# Altium PCB 7 segment 2 layer.PcbDoc
Units mil, origin at the board's own origin, x right, y up, seen from the top; angles counter-clockwise.
Board outline 5118.11 x 3543.31 mil, 2 copper layers (Top Layer, Bottom Layer); 50 components, 86 nets, 283 pads, 9 vias.
Unrouted connection lines stored in the file: 1.
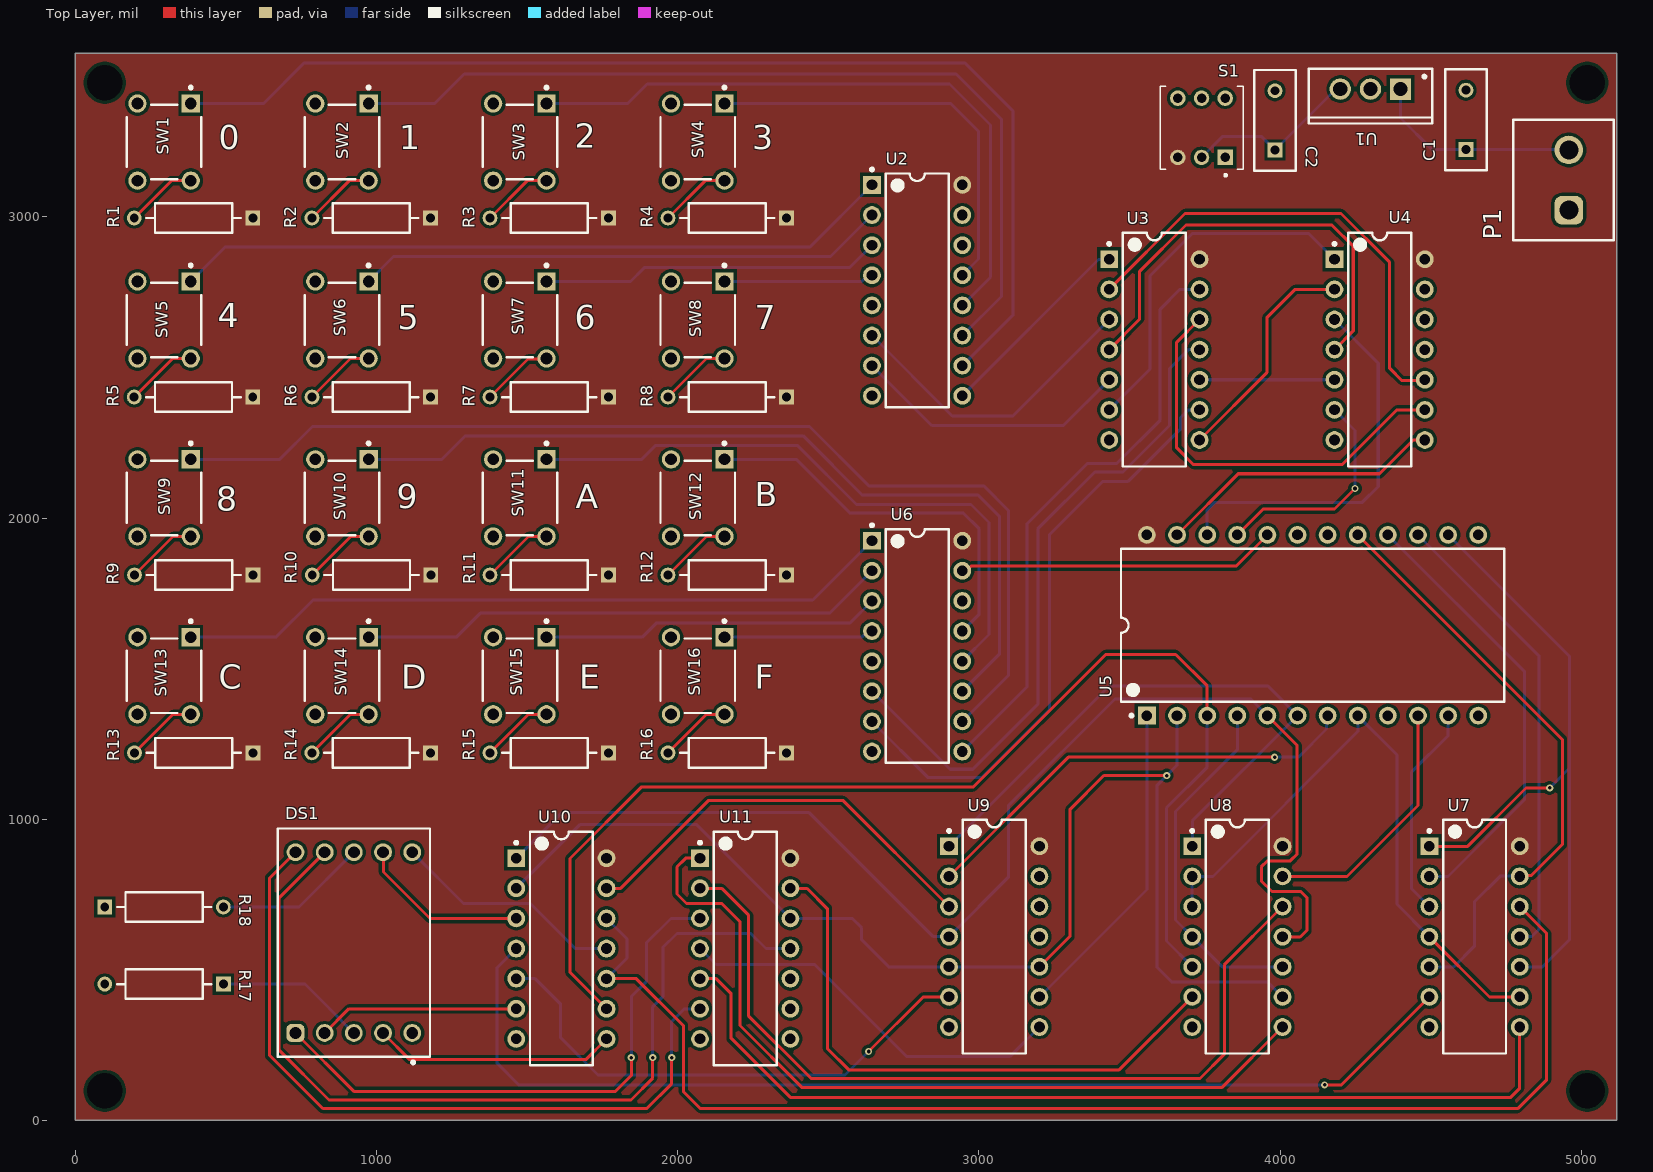
[diagram p0: Top Layer view]
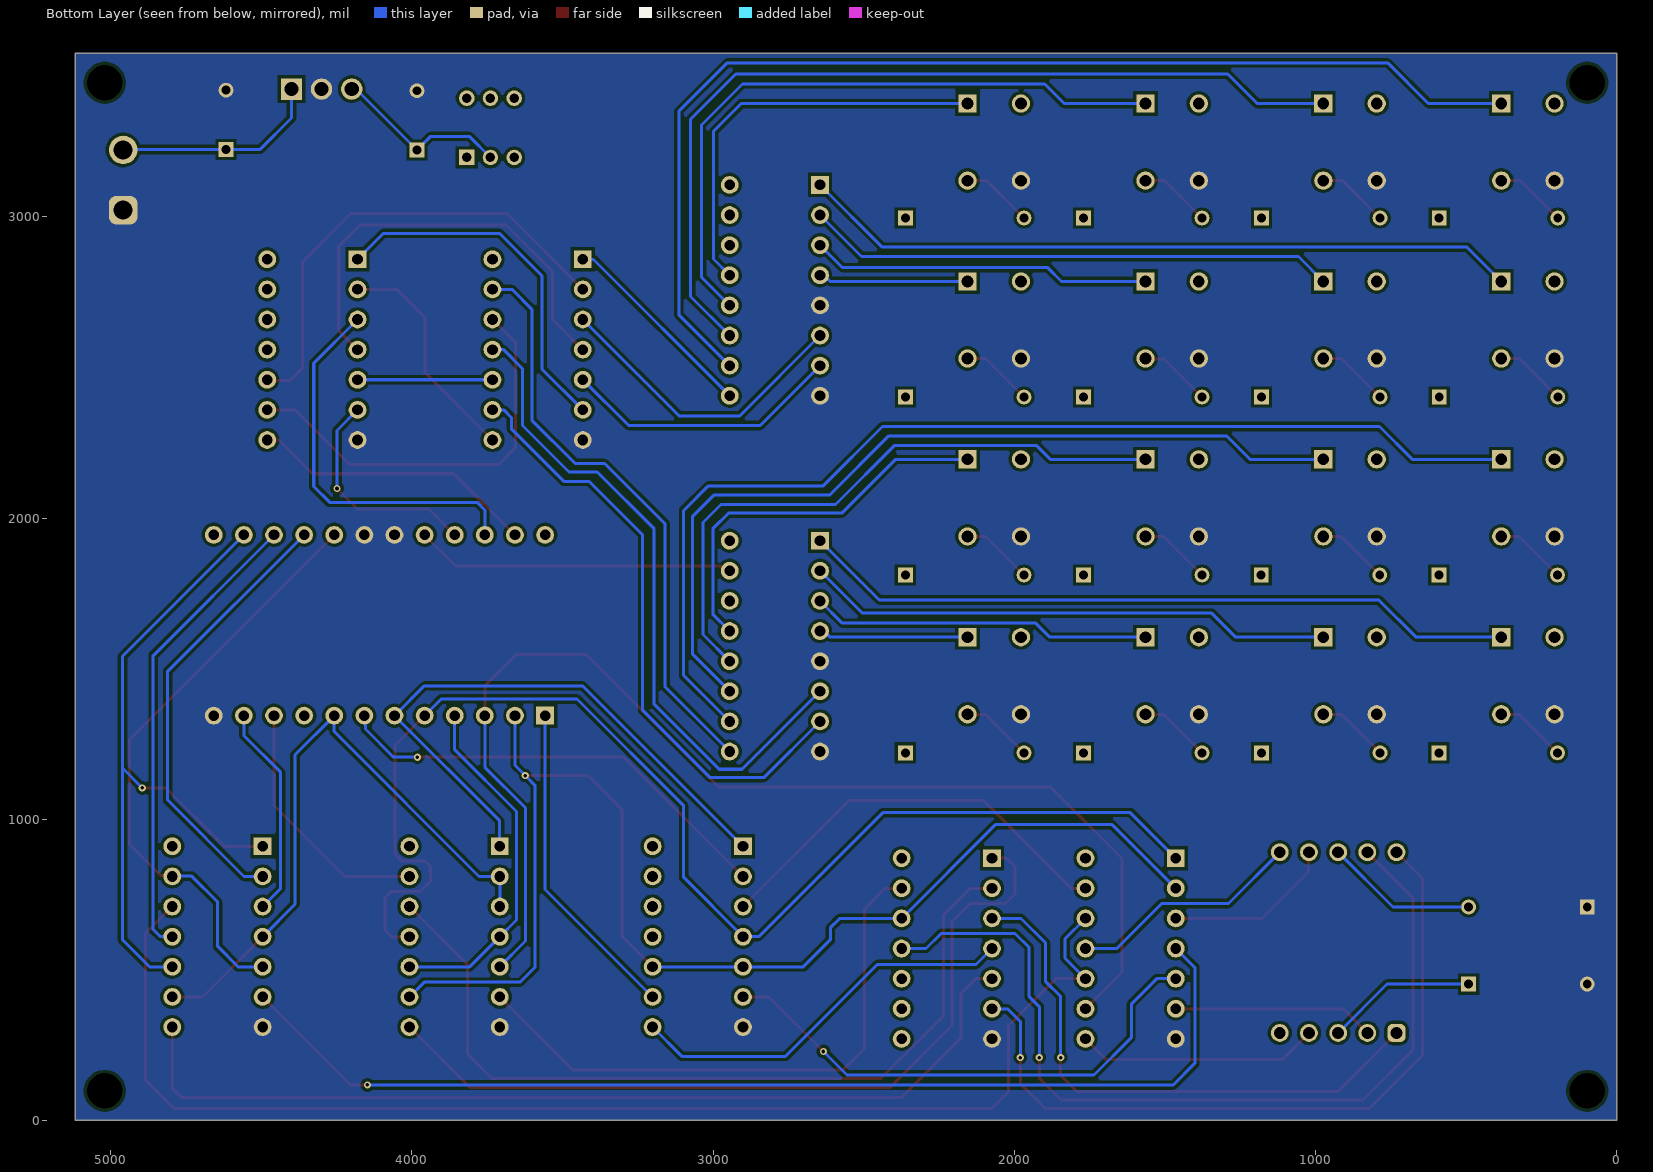
[diagram p1: Bottom Layer view, seen from below]
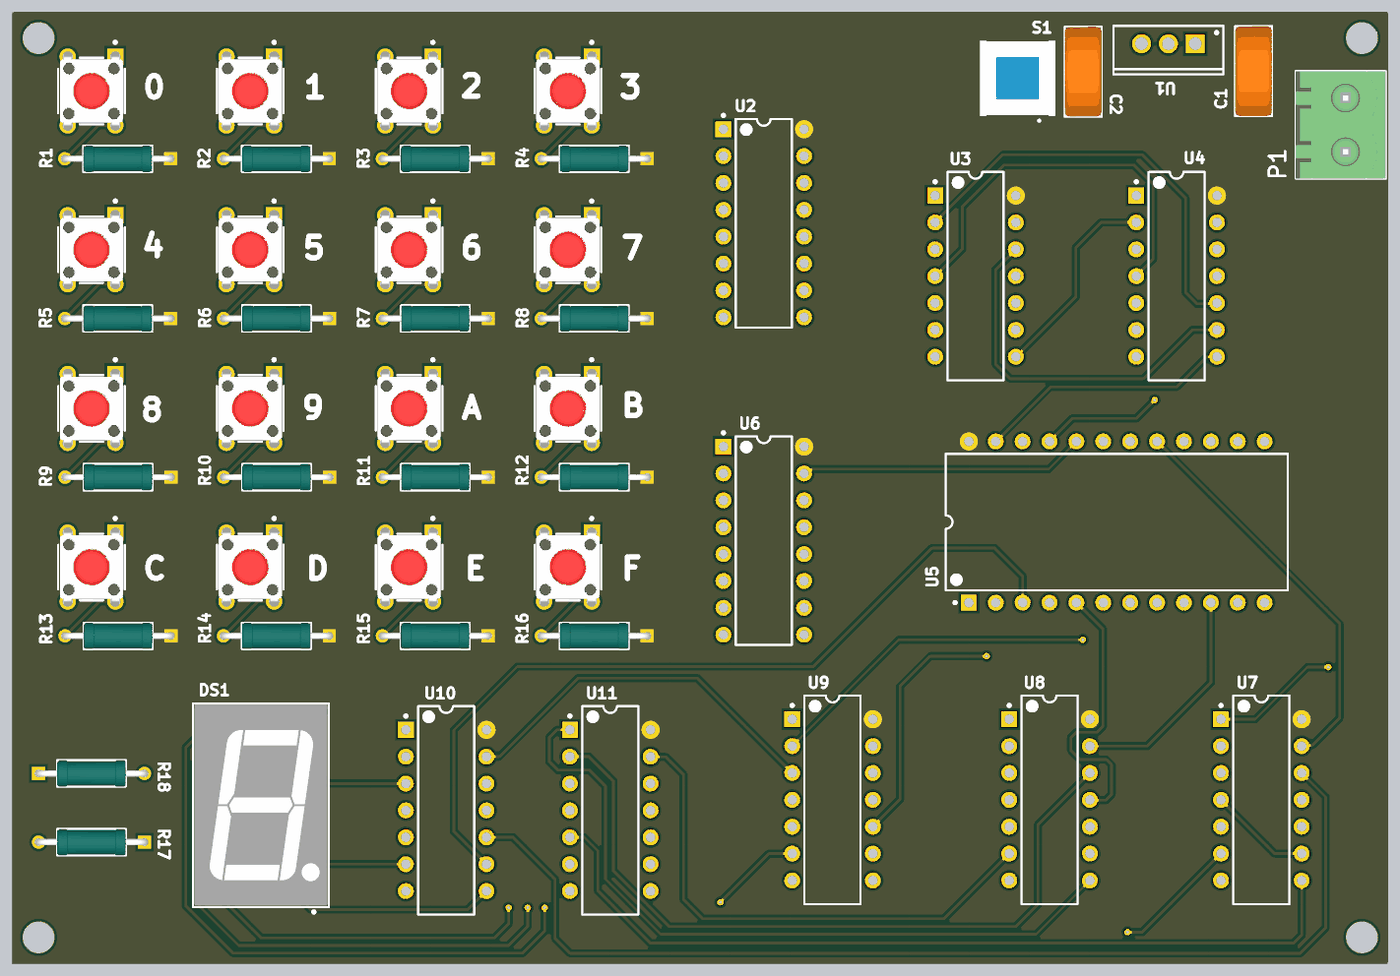
[diagram p2: 3D render of the assembled board from above, using the file's embedded part models]

## Layer stack, top to bottom
Top Solder: solder mask 0.4, Solder Resist, Dk 3.5
Top Layer: signal copper 1.4
Dielectric 1: dielectric 12.6, FR-4, Dk 4.8
Bottom Layer: signal copper 1.4
Bottom Solder: solder mask 0.4, Solder Resist, Dk 3.5

## Board outline
0,0 5118.11,0 5118.11,3543.31 0,3543.31

## Design rules (kind name [scope] priority, off if disabled: settings)
BoardOutlineClearance [All] p1 off: gap=10 ignorepadtopadclearanceinfootprint=FALSE except(0: Arc-SplitContinuation Track-SplitContinuation SMDPad-SplitContinuation THPad-SplitContinuation Via-SplitContinuation Fill-SplitContinuation Poly-SplitContinuation Region-SplitContinuation Text-SplitContinuation)
Clearance [All] p1: gap=10 ignorepadtopadclearanceinfootprint=FALSE
HoleSize [All] p1: absolutevalues=TRUE maxlimit=200 minlimit=1 maxpercent=80.000 minpercent=20.000
PlaneConnect [All] p1: planeconnectstyle=Direct reliefexpansion=20 reliefentries=4 reliefconductorwidth=10 reliefairgap=10
PolygonConnect [All] p1: connectstyle=Direct reliefconductorwidth=10 reliefentries=4 polygonreliefangle="90 Angle" airgapwidth=10
RoutingVias [All] p1: holewidth=28 width=50 viastyle="Through Hole" minholewidth=23.62 minwidth=39.37 maxholewidth=28 maxwidth=50
SolderMaskExpansion [All] p1: expansion=4 istentingtop=FALSE
SupplyNets "Schematic Supply Nets_1" [InNet('+5')] p1: voltage=0.000
SupplyNets "Schematic Supply Nets" [InNet('GND')] p2: voltage=0.000
Width [All] p1: maxlimit=10 minlimit=10 preferedwidth=10
28 further rules are at their usual default settings.

## Classes and differential pairs
component class "switch 2": R1 R2 R3 R4 R5 R6 R7 R8 R9 R10 R11 R12 R13 R14 R15 R16 SW1 SW2 SW3 SW4 SW5 SW6 SW7 SW8 SW9 SW10 SW11 SW12 SW13 SW14 SW15 SW16
component class "Input power": C1 C2 P1 S1 U1
component class "Final out 2": DS1 R17 R18 U10 U11
component class "encode and decode 2": U2 U3 U4 U5 U6
component class "AND operations 2": U7 U8 U9

## Components (designator, comment, footprint, x,y, rotation, side; value= is the part's Value field where it differs from the comment)
C1 "D222K33Y5PL6UJ5R" FP-D222K33Y5PL6UJ5R-MFG 4617.07,3322 r90 top
C2 "D222K33Y5PL6UJ5R" FP-D222K33Y5PL6UJ5R-MFG 3983.07,3320 r90 top
DS1 "157142V12703" WL-T7DS_L19W12.6H7.9 925.2,590.55 r0 top
P1 "691311500002" 691311500002 4940.94,3122.05 r90 top
R1 "MRS25000C1001FCT00" FP-MRS25-MFG 393,2996.06 r180 top
R2 "MRS25000C1001FCT00" FP-MRS25-MFG 982.85,2996.06 r180 top
R3 "MRS25000C1001FCT00" FP-MRS25-MFG 1573.85,2996.06 r180 top
R4 "MRS25000C1001FCT00" FP-MRS25-MFG 2165,2996.06 r180 top
R5 "MRS25000C1001FCT00" FP-MRS25-MFG 392.85,2401.57 r180 top
R6 "MRS25000C1001FCT00" FP-MRS25-MFG 983,2401.57 r180 top
R7 "MRS25000C1001FCT00" FP-MRS25-MFG 1574,2401.57 r180 top
R8 "MRS25000C1001FCT00" FP-MRS25-MFG 2164.85,2401.57 r180 top
R9 "MRS25000C1001FCT00" FP-MRS25-MFG 393.85,1811.02 r180 top
R10 "MRS25000C1001FCT00" FP-MRS25-MFG 983.85,1811.02 r180 top
R11 "MRS25000C1001FCT00" FP-MRS25-MFG 1574,1811.02 r180 top
R12 "MRS25000C1001FCT00" FP-MRS25-MFG 2165,1811.02 r180 top
R13 "MRS25000C1001FCT00" FP-MRS25-MFG 393.85,1220.47 r180 top
R14 "MRS25000C1001FCT00" FP-MRS25-MFG 982.85,1220.47 r180 top
R15 "MRS25000C1001FCT00" FP-MRS25-MFG 1573.85,1220.47 r180 top
R16 "MRS25000C1001FCT00" FP-MRS25-MFG 2165,1220.47 r180 top
R17 "MRS25000C1001FCT00" FP-MRS25-MFG 295.28,452.76 r180 top
R18 "MRS25000C1001FCT00" FP-MRS25-MFG 295.28,708.66 r0 top
S1 "TL2230OAF140" SW_TL2230OAF140 3739.33,3295.43 r180 top
SW1 "1-1825910-5" FP-1-1825910-5-MFG 295.28,3248.03 r0 top
SW2 "1-1825910-5" FP-1-1825910-5-MFG 885.83,3248.03 r0 top
SW3 "1-1825910-5" FP-1-1825910-5-MFG 1476.38,3248.03 r0 top
SW4 "1-1825910-5" FP-1-1825910-5-MFG 2066.93,3248.03 r0 top
SW5 "1-1825910-5" FP-1-1825910-5-MFG 295.28,2657.48 r0 top
SW6 "1-1825910-5" FP-1-1825910-5-MFG 885.83,2657.48 r0 top
SW7 "1-1825910-5" FP-1-1825910-5-MFG 1476.38,2657.48 r0 top
SW8 "1-1825910-5" FP-1-1825910-5-MFG 2066.93,2657.48 r0 top
SW9 "1-1825910-5" FP-1-1825910-5-MFG 295.28,2066.93 r0 top
SW10 "1-1825910-5" FP-1-1825910-5-MFG 885.83,2066.93 r0 top
SW11 "1-1825910-5" FP-1-1825910-5-MFG 1476.38,2066.93 r0 top
SW12 "1-1825910-5" FP-1-1825910-5-MFG 2066.93,2066.93 r0 top
SW13 "1-1825910-5" FP-1-1825910-5-MFG 295.28,1476.38 r0 top
SW14 "1-1825910-5" FP-1-1825910-5-MFG 885.83,1476.38 r0 top
SW15 "1-1825910-5" FP-1-1825910-5-MFG 1476.38,1476.38 r0 top
SW16 "1-1825910-5" FP-1-1825910-5-MFG 2066.93,1476.38 r0 top
U1 "L7805CP" TO220FP 4300.07,3424 r180 top
U2 "SN74LS148N" N0016A 2795.28,2755.91 r0 top
U3 "SN74HCU04N" N0014A 3582.68,2559.06 r0 top
U4 "SN7432N" N0014A 4330.71,2559.06 r0 top
U5 "SN74154N" N0024A 4108,1644 r90 top
U6 "SN74LS148N" N0016A 2795.28,1574.8 r0 top
U7 "SN74LS11N" N0014A 4645.67,610.24 r0 top
U8 "SN74LS11N" N0014A 3858.27,610.24 r0 top
U9 "SN74S08N" N0014A 3051.18,610.24 r0 top
U10 "SN74S08N" N0014A 1614.17,570.87 r0 top
U11 "SN74S08N" N0014A 2224.41,570.87 r0 top

## Footprints (in the part's own frame and the unit in brackets; to place one, negate y for a bottom-side part, rotate by r counter-clockwise, add the part's x,y. Pads: shape width x height; smd on the part's side, far side on the other; paste and mask are expansions set on the pad)
691311500002 [mm] "5,08mm - PCB Headers - Vertical - Opened ends -02p"
  rrect50% 2.4x2.4 hole 1.6: 1(-2.54,-0.45)
  round 2.4 hole 1.6: 2(2.54,-0.45)
  silkscreen extent -5.08,-4.25 5.08,4.25, body extent -5.08,-4.25 5.08,4.25, height 12.05
FP-1-1825910-5-MFG [mm]
  rect 1.54x1.54 hole 0.99 paste-2539.97 mask+0: 1(2.25,3.25)
  round 1.54 hole 0.99 paste-2539.97 mask+0: 2(2.25,-3.25) 3(-2.25,3.25) 4(-2.25,-3.25)
  silkscreen extent -3.15,-3.15 3.15,4.72, body extent -3.24,-4.12 3.24,4.12, height 0.25
FP-D222K33Y5PL6UJ5R-MFG [mm]
  rect 1.25x1.25 hole 0.75 paste-2539.97 mask+0: 1(-2.5,0)
  round 1.25 hole 0.75 paste-2539.97 mask+0: 2(2.5,0)
  silkscreen extent -4.25,-1.75 4.25,1.75, body extent -4.35,-1.85 4.35,1.85, height 0.25
FP-MRS25-MFG [mm]
  rect 1.25x1.25 hole 0.75 paste-2539.97 mask+0: 1(-5,0)
  round 1.25 hole 0.75 paste-2539.97 mask+0: 2(5,0)
  silkscreen extent -3.98,-1.25 3.98,1.25, body extent -5.73,-1.35 5.73,1.35, height 0.25
N0014A [mm] "DIP, 14-Leads, Body 19.7x6.6mm, Pitch 2.54mm"
  rect 1.5x1.5 hole 0.9: 1(-3.81,7.62)
  round 1.5 hole 0.9: 2(-3.81,5.08) 3(-3.81,2.54) 4(-3.81,0) 5(-3.81,-2.54) 6(-3.81,-5.08) 7(-3.81,-7.62) 8(3.81,-7.62) 9(3.81,-5.08) 10(3.81,-2.54) 11(3.81,0) 12(3.81,2.54) 13(3.81,5.08) 14(3.81,7.62)
  silkscreen extent -3.93,-9.85 2.65,9.85, body extent -3.95,-9.85 3.95,9.85, height 5.08
N0016A [mm] "DIP, 16-Leads, Body 19.7x6.6mm, Pitch 2.54mm"
  rect 1.5x1.5 hole 0.9: 1(-3.81,8.89)
  round 1.5 hole 0.9: 2(-3.81,6.35) 3(-3.81,3.81) 4(-3.81,1.27) 5(-3.81,-1.27) 6(-3.81,-3.81) 7(-3.81,-6.35) 8(-3.81,-8.89) 9(3.81,-8.89) 10(3.81,-6.35) 11(3.81,-3.81) 12(3.81,-1.27) 13(3.81,1.27) 14(3.81,3.81) 15(3.81,6.35) 16(3.81,8.89)
  silkscreen extent -3.93,-9.85 2.65,10.31, body extent -3.95,-9.85 3.95,9.85, height 5.08
N0024A [mm] "DIP, 24-Leads, Body 32.25x14.2mm, Pitch 2.54mm"
  rect 1.5x1.5 hole 0.9: 1(-7.62,13.97)
  round 1.5 hole 0.9: 2(-7.62,11.43) 3(-7.62,8.89) 4(-7.62,6.35) 5(-7.62,3.81) 6(-7.62,1.27) 7(-7.62,-1.27) 8(-7.62,-3.81) 9(-7.62,-6.35) 10(-7.62,-8.89) 11(-7.62,-11.43) 12(-7.62,-13.97) 13(7.62,-13.97) 14(7.62,-11.43) 15(7.62,-8.89) 16(7.62,-6.35) 17(7.62,-3.81) 18(7.62,-1.27) 19(7.62,1.27) 20(7.62,3.81) 21(7.62,6.35) 22(7.62,8.89) 23(7.62,11.43) 24(7.62,13.97)
  silkscreen extent -7.74,-16.15 6.45,16.15, body extent -7.76,-16.12 7.76,16.12, height 5.08
SW_TL2230OAF140 [mm]
  rect 1.308x1.308 / inner round 1.308 / far side rect 1.308x1.308 hole 0.8: 1(-2,2.5)
  round 1.308 hole 0.8: 2(0,2.5) 3(2,2.5) 4(-2,-2.5) 5(0,-2.5) 6(2,-2.5)
  silkscreen extent -3.5,-3.5 3.5,4.1, body extent -3.5,-3.5 3.5,3.5, height 12.5
TO220FP [mm] "TO, Thru-Hole, Vertical, Heatsink Mounted; 3 In-Line Leads; Pitch 2.54 mm"
  rect 1.8x1.8 hole 1.2: 1(-2.54,0)
  round 1.8 hole 1.2: 2(0,0) 3(2.54,0)
  silkscreen extent -5.2,-1.7 5.2,2.9, body extent -5.25,-1.75 5.25,2.95, height 20
WL-T7DS_L19W12.6H7.9 [mm] "7 Segments Display THT Single Digit , body 12.6x19mm"
  rrect50% 1.5x1.5 hole 1: 1(-4.92,-7.62)
  round 1.5 hole 1: 2(-2.46,-7.62) 3(0,-7.62) 4(2.46,-7.62) 5(4.92,-7.62) 6(4.92,7.62) 7(2.46,7.62) 8(0,7.62) 9(-2.46,7.62) 10(-4.92,7.62)
  silkscreen extent -6.43,-10.22 6.43,9.62, body extent -6.3,-9.5 6.3,9.5, height 8.1

## Part data
C1 C2: library part CMP-02417-000074-1, "CAP CER 2200PF 500V Y5P RADIAL", Capacitance=2.2nF, Case/Package=Radial, Dielectric=Y5P, Max Operating Temperature=85°C, Min Operating Temperature=-30°C, Package Quantity=2000, Resistor Type=Ceramic, Tolerance=10%, Voltage Rating=500V, Construction=RADIAL, Contact Plating=Tin, Depth=4mm, Lead Diameter=0.6mm, Lead Pitch=5mm, Lead/Base Style=Kinked, Mount="Through Hole", Packaging="Tape and Reel", Radiation Hardening=No, RoHS Compliant=Yes, Series=D, Termination=Radial
DS1: library part CMP-03913-119894004-1, "157142V12703 7-Seg Display, Comm Cathode, Grn, 46Mcd Rohs Compliant: Yes", Forward Current=100mA, Forward Voltage=2.2V, Max Operating Temperature=85°C, Max Reverse Voltage (DC)=5V, Min Operating Temperature=-40°C, Dominant Wavelength=572nm, Height=8mm, Length=19mm, Luminous Intensity=25mcd, NexarPartId=119894004, RoHS=Compliant, Width=12.6mm
P1: library part CMP-1502-02123-2, Color=Green, Current=20A, Voltage=300V, Contact Material=Brass, Contact Plating=Tin, Gender=Male, Height=12mm, Lead Pitch=5.08mm, Length=8.5mm, Mount="Through Hole", NexarPartId=8917741, Number of Contacts=2, Number of Levels=1, Number of Pins=2, Number of Positions Per Level=2, Number of Rows=1, Orientation=Vertical, Packaging=Box, Pitch=5.08mm, REACH SVHC=Unknown, RoHS=Compliant, Termination=Solder, Width=10.16mm
R1 R2 R3 R4 R5 R6 R7 R8 R9 R10 R11 R12 R13 R14 R15 R16 R17 R18: library part CMP-02408-000051-1, "RES 1K OHM 0.6W 1% AXIAL", Case/Package=Axial, Max Operating Temperature=155°C, Max Power Dissipation=600mW, Min Operating Temperature=-55°C, Package Quantity=5000, Resistance=1kR, Resistance Tolerance=1%, Resistor Type="Metal Film", Temperature Coefficient=50ppm/°C, Voltage Rating=350V, Construction=Cylindrical, Contact Plating=Tin, Diameter=2.5mm, Lead Diameter=0.6mm, Lead Free="Lead Free", Length=6.5mm, Military Standard=Not, Mount="Through Hole", Number of Pins=2, Number of Terminations=2, Packaging="Tape and Reel", Power Rating=600mW, Radiation Hardening=No, RoHS Compliant=Yes, Series=MRS25, Technology="THIN FILM", Termination=Axial, Tolerance=1%, Voltage Rating (DC)=350V, Weight=0.00776oz, Width=2.5mm
S1: "Pushbutton Switch DPDT Standard Through Hole", Package=None, Check_prices=https://www.snapeda.com/parts/TL2230OAF140/E-Switch/view-part/?ref=eda, MF=E-Switch, MP=TL2230OAF140, SnapEDA_Link=https://www.snapeda.com/parts/TL2230OAF140/E-Switch/view-part/?ref=snap
SW1 SW2 SW3 SW4 SW5 SW6 SW7 SW8 SW9 SW10 SW11 SW12 SW13 SW14 SW15 SW16: library part CMP-03407-000006-1, "SWITCH TACTILE SPST-NO 0.05A 24V", Actuator Color=Red, Contact Current Rating=50mA, Contact Resistance=100mR, Max Operating Temperature=85°C, Max Voltage Rating (DC)=24V, Min Operating Temperature=-35°C, Operating Force=2.55N, Package Quantity=750, Actuator Length=5.9mm, Actuator Material=PBT, Actuator Type=Standard, Contact Material=Brass, Contact Plating=Silver, Electrical Life=100000Cycles, Illumination Type=Non-Illuminated, Length=5.99mm, Max Current Rating=50mA, Mechanical Life=100000Cycles, Mount="Through Hole", Orientation=Straight, Packaging="Loose Piece", Radiation Hardening=No, RoHS Compliant=Yes, Series="FSMJ, Alcoswitch", Switch Function=Off-Mom, Switch Travel=0.25mm, Termination="PC Pins", Throw Configuration=SPST, Type=Switch, Voltage Rating (DC)=24V
U1: library part CMP-0244-00474-1, "Positive Voltage Regulator, 5V, 3-Pin TO-220FP", ComponentLink1Description="Manufacturer URL", ComponentLink1URL=http://www.st.com, ComponentLink2Description=Datasheet, ComponentLink2URL=http://www.st.com/internet/com/TECHNICAL_RESOURCES/TECHNICAL_LITERATURE/DATASHEET/CD00000444.pdf, DatasheetVersion=16/11/2011, PackageDescription="TO, Thru-Hole, Vertical, Heatsink Mounted; 3 In-Line Leads; Pitch 2.54 mm", PackageReference=TO220FP, PackageVersion=2011
U2 U6: library part CMP-1633-00673-2, "8-line to 3-line priority encoder, N0016A, TUBE", F @ Nom Voltage(Max)(Mhz)=35, Generic Part Number=SN74LS148, ICC @ Nom Voltage(Max)(mA)=20, Manufacturer="Texas Instruments", Operating Temperature Range(C)="0 to 70", Rating=Catalog, tpd @ Nom Voltage(Max)(ns)=19, Voltage(Nom)(V)=5, Bits(#)=8, Channels(#)=1, Code_JEDEC=MS-001, Configuration=8：3, DatasheetVersion=SDLS053B, Function=Encoder/Multiplexer, Input Type=TTL, Output Drive (IOL/IOH)(Max)(mA)=8/-0.4, Output Type=TTL, PackageReference=N0016A, Schmitt Trigger=No, Technology Family=LS, Type=Standard, VCC(Max)(V)=5.25, VCC(Min)(V)=4.75
U3: library part CMP-1615-00910-2, "Hex Inverters, N0014A, TUBE", F @ Nom Voltage(Max)(Mhz)=20, Generic Part Number=SN74HCU04, ICC @ Nom Voltage(Max)(mA)=0.02, Manufacturer="Texas Instruments", Operating Temperature Range(C)="-40 to 85", Rating=Catalog, Voltage(Nom)(V)=5, Bits(#)=6, Code_JEDEC=MS-001, DatasheetVersion=SCLS079E, Input Type=CMOS, Output Drive (IOL/IOH)(Max)(mA)=-4/4, Output Type=CMOS, PackageReference=N0014A, Schmitt Trigger=No, Technology Family=HC, tpd @ Nom Voltage(Max)(ns)=20, VCC(Max)(V)=6, VCC(Min)(V)=2
U4: library part CMP-1573-00140-3, "Quad 2-input positive-OR gates, N0014A, TUBE", F @ Nom Voltage(Max)(Mhz)=100, Generic Part Number=SN7432, ICC @ Nom Voltage(Max)(mA)=0.038, Manufacturer="Texas Instruments", Operating Temperature Range(C)="0 to 70", Rating=Catalog, tpd @ Nom Voltage(Max)(ns)=22, Voltage(Nom)(V)=5, Bits(#)=4, Code_JEDEC=MS-001, DatasheetVersion=SDLS100, Input Type=TTL, Output Drive (IOL/IOH)(Max)(mA)=0.8/-16, Output Type=TTL, PackageReference=N0014A, PackageVersion=http://www.ti.com/lit/ml/mpdi002c/mpdi002c.pdf, VCC(Max)(V)=5.25, VCC(Min)(V)=4.75
U5: library part CMP-1633-00734-2, "4-Line To 16-Line Decoders/Demultiplexers, N0024A, TUBE", Generic Part Number=SN74154, Manufacturer="Texas Instruments", Code_JEDEC=MS-011, DatasheetVersion=SDLS056, PackageReference=N0024A
U7 U8: library part CMP-0777-00254-3, "Triple 3-input positive-AND gates, N0014A, TUBE", F @ Nom Voltage(Max)(Mhz)=35, Generic Part Number=SN74LS11, ICC @ Nom Voltage(Max)(mA)=0.0036, Manufacturer="Texas Instruments", Operating Temperature Range(C)="0 to 70", Rating=Catalog, tpd @ Nom Voltage(Max)(ns)=15, Voltage(Nom)(V)=5, Bits(#)=3, DatasheetVersion=SDLS131, Input Type=TTL, Output Drive (IOL/IOH)(Max)(mA)=0/8, Output Type=TTL, PackageReference=N0014A, Schmitt Trigger=No, Technology Family=LS, VCC(Max)(V)=5.25, VCC(Min)(V)=4.75
U9 U10 U11: library part CMP-0777-00282-3, "Quad 2-input positive-AND gates, N0014A, TUBE", F @ Nom Voltage(Max)(Mhz)=50, Generic Part Number=SN74S08, ICC @ Nom Voltage(Max)(mA)=0.032, Manufacturer="Texas Instruments", Operating Temperature Range(C)="0 to 70", Rating=Catalog, tpd @ Nom Voltage(Max)(ns)=7.5, Voltage(Nom)(V)=5, Bits(#)=4, DatasheetVersion=SDLS033, Input Type=TTL, Output Drive (IOL/IOH)(Max)(mA)=-24/24, Output Type=TTL, PackageReference=N0014A, Schmitt Trigger=No, Technology Family=S, VCC(Max)(V)=5.25, VCC(Min)(V)=4.75

## Free pads (board coordinates)
  round 0 hole 118.11: 18(98.43,3444.88) 19(98.43,98.43) 20(5019.69,98.43) 21(5019.69,3444.88)

## Via types
v1: diameter 24, hole 12, Top Layer to Bottom Layer, 9 vias

## Nets (pads, with @x,y where several pads share a name; then routed paths per layer and width w, separated by ;. In a path a pad name is that pad's centre, name@x,y a point inside that pad or via, vN(x,y) a via of type N, cw(c..) or ccw(c..) an arc to the next point about the centre after c; other vN are vias at no path point)
1A0': U2.9 U3.1 | length 675.1
  Bottom Layer w10: U2.9 3397.37,2858 3431.62,2858 U3.1
1A1': U2.7 U3.5 | length 932.8
  Bottom Layer w10: U2.7 2844.18,2307 3280.62,2307 U3.5
1A2': U2.6 U3.3 | length 1030.5
  Bottom Layer w10: U2.6 2912.18,2339 3112.62,2339 U3.3
2A0': U3.13 U6.9 | length 1955.7
  Bottom Layer w10: U6.9 3160,1439.53 3160,1981 3360,2181 3458,2181 3602,2325 3602,2693 3668.06,2759.06 U3.13
2A1': U3.9 U6.7 | length 2033.7
  Bottom Layer w10: U6.7 2832.08,1138 3010,1138 3234,1362 3234,1944 3412,2122 3496,2122 3670,2296 3670,2334 3694,2358 3731.62,2358 U3.9
2A2': U3.11 U6.6 | length 2224
  Bottom Layer w10: U6.6 2904.08,1166 2980,1166 3196,1382 3196,1964 3385,2153 3479,2153 3633,2307 3633,2496 3697,2560 3731.73,2560 U3.11
+5: R1.1 R2.1 R3.1 R4.1 R5.1 R6.1 R7.1 R8.1 R9.1 R10.1 R11.1 R12.1 R13.1 R14.1 R15.1 R16.1 S1.3 U2.16 U3.14 U4.14 U5.24 U6.16 U7.14 U8.14 U9.14 U10.14 U11.14
A: DS1.7 U10.3 | length 570.4
  Top Layer w10: DS1.7 1024,888.6 1024,825 1178.13,670.87 U10.3
B: DS1.6 U10.11 | length 777.7
  Bottom Layer w10: DS1.6 1289.45,720 1511,720 1660.13,570.87 U10.11
C: DS1.4 U10.8 | length 807.3
  Top Layer w10: DS1.4 1110.6,202 1695.31,202 U10.8
D: DS1.2 U10.6 | length 669.1
  Top Layer w10: DS1.2 908.66,370.87 U10.6
E: DS1.1 U11.3 | length 1889.2
  Top Layer w10: DS1.1 925.05,97 1794,97 1846.46,149.46 v1(1846.46,208.66)
  Bottom Layer w10: v1(1846.46,208.66) 1846.46,411.46 1896,461 1896,589 1977.87,670.87 U11.3
F: DS1.9 U11.11 | length 2970.4
  Top Layer w10: DS1.9 676,738.2 676,235 843,68 1845,68 1917.32,140.32 v1(1917.32,208.66)
  Bottom Layer w10: v1(1917.32,208.66) 1917.32,377.32 1951,411 1951,574 1998,621 2243,621 2293.13,570.87 U11.11
G: DS1.10 U11.6 | length 2468.9
  Top Layer w10: DS1.10 646,805.06 646,216 822,40 1898,40 1980.32,122.31 v1(1980.32,208.66)
  Bottom Layer w10: v1(1980.32,208.66) 1980.32,328.23 2022.95,370.87 U11.6
GND: C1.2 C2.2 P1.1 R17.2 R18.1 SW1.4 SW2.4 SW3.4 SW4.4 SW5.4 SW6.4 SW7.4 SW8.4 SW9.4 SW10.4 SW11.4 SW12.4 SW13.4 SW14.4 SW15.4 SW16.4 U1.2 U2.5 U2.8 U3.7 U4.7 U5.12 U5.18 U5.19 U6.5 U6.8 U7.7 U8.7 U9.7 U10.7 U11.7
I0: SW1.1 U2.10 | length 3766.7
  Bottom Layer w10: SW1.1 625.98,3375.98 761,3511 2953,3511 3114,3350 3114,2674.63 U2.10
I1: SW2.1 U2.11 | length 2975.2
  Bottom Layer w10: SW2.1 1193.98,3375.98 1292,3474 2925,3474 3075,3324 3075,2735.63 U2.11
I2: SW3.1 U2.12 | length 2195.2
  Bottom Layer w10: SW3.1 1834.63,3375.98 1899.65,3441 2903,3441 3039,3305 3039,2799.63 U2.12
I3: SW4.1 U2.13 | length 1381.9
  Bottom Layer w10: SW4.1 2907.02,3375.98 2999,3284 2999,2859.63 U2.13
I4: SW5.1 U2.1 | length 2394.2
  Bottom Layer w10: SW5.1 497.43,2899 2438.37,2899 U2.1
I5: SW6.1 U2.2 | length 1762.2
  Bottom Layer w10: SW6.1 1056.98,2868 2507.37,2868 U2.2
I6: SW7.1 U2.3 | length 1130.2
  Bottom Layer w10: SW7.1 1843.43,2785.43 1889,2831 2570.37,2831 U2.3
I7: SW8.1 U2.4 | length 498.2
  Bottom Layer w10: SW8.1 2611.53,2785.43 2632,2805.91 U2.4
I8: SW9.1 U6.10 | length 3638.4
  Bottom Layer w10: SW9.1 678.88,2194.88 788,2304 2438,2304 2635,2107 3016,2107 3098,2025 3098,1477.53 U6.10
I9: SW10.1 U6.11 | length 2868.6
  Bottom Layer w10: SW10.1 1217.88,2194.88 1296,2273 2417,2273 2614,2076 2998,2076 3068,2006 3068,1547.53 U6.11
I10: SW11.1 U6.12 | length 2090.5
  Bottom Layer w10: SW11.1 1880.88,2194.88 1926,2240 1959.38,2240 1959.58,2240.2 2398.8,2240.2 2594,2045 2974,2045 3034,1985 3034,1613.53 U6.12
I11: SW12.1 U6.13 | length 1303.4
  Bottom Layer w10: SW12.1 2394.12,2194.88 2573,2016 2949,2016 3001,1964 3001,1680.53 U6.13
I12: SW13.1 U6.1 | length 2394.2
  Bottom Layer w10: SW13.1 666.33,1604.33 790,1728 2448.47,1728 U6.1
I13: SW14.1 U6.2 | length 1762.2
  Bottom Layer w10: SW14.1 1265.33,1604.33 1345,1684 2504.47,1684 U6.2
I14: SW15.1 U6.3 | length 1130.2
  Bottom Layer w10: SW15.1 1882.33,1604.33 1929,1651 2571.47,1651 U6.3
I15: SW16.1 U6.4 | length 498.2
  Bottom Layer w10: SW16.1 2611.53,1604.33 2632,1624.8 U6.4
NetC1_1: C1.1 P1.2 U1.1 | length 698.5
  Bottom Layer w10: U1.1 4400.07,3328 4504.07,3224 4616.65,3224 C1.1 4957.13,3223.57 P1.2
NetC2_1: C2.1 S1.2 U1.3 | length 592.4
  Bottom Layer w10: S1.2 3809.33,3267 3937.65,3267 C2.1 4185.5,3424 U1.3
NetDS1_3: DS1.3 R17.1 | length 500.3
  Bottom Layer w10: R17.1 762.99,452.76 DS1.3
NetDS1_8: DS1.8 R18.2 | length 508.4
  Bottom Layer w10: R18.2 743.31,708.66 DS1.8
NetR1_2: R1.2 SW1.2 | length 239.1
  Top Layer w10: R1.2 320.17,3120.08 SW1.2
NetR2_2: R2.2 SW2.2 | length 239.8
  Top Layer w10: R2.2 910.02,3120.08 SW2.2
NetR3_2: R3.2 SW3.2 | length 239.3
  Top Layer w10: R3.2 1501.02,3120.08 SW3.2
NetR4_2: R4.2 SW4.2 | length 238.7
  Top Layer w10: R4.2 2092.17,3120.08 SW4.2
NetR5_2: R5.2 SW5.2 | length 240.9
  Top Layer w10: R5.2 323.95,2529.53 SW5.2
NetR6_2: R6.2 SW6.2 | length 241.3
  Top Layer w10: R6.2 914.1,2529.53 SW6.2
NetR7_2: R7.2 SW7.2 | length 240.8
  Top Layer w10: R7.2 1503.57,2528 1563.43,2528 SW7.2
NetR8_2: R8.2 SW8.2 | length 240.5
  Top Layer w10: R8.2 2095.95,2529.53 SW8.2
NetR9_2: R9.2 SW9.2 | length 239.9
  Top Layer w10: R9.2 324.95,1938.98 SW9.2
NetR10_2: R10.2 SW10.2 | length 240.4
  Top Layer w10: R10.2 914.95,1938.98 SW10.2
NetR11_2: R11.2 SW11.2 | length 240.8
  Top Layer w10: R11.2 1505.1,1938.98 SW11.2
NetR12_2: R12.2 SW12.2 | length 240.4
  Top Layer w10: R12.2 2096.1,1938.98 SW12.2
NetR13_2: R13.2 SW13.2 | length 239.9
  Top Layer w10: R13.2 324.95,1348.43 SW13.2
NetR14_2: R14.2 SW14.2 | length 241.4
  Top Layer w10: R14.2 913.95,1348.43 SW14.2
NetR15_2: R15.2 SW15.2 | length 241
  Top Layer w10: R15.2 1504.95,1348.43 SW15.2
NetR16_2: R16.2 SW16.2 | length 240.4
  Top Layer w10: R16.2 2096.1,1348.43 SW16.2
NetU3_2: U3.2 U4.10 | length 1589.7
  Top Layer w10: U3.2 3684.62,3011 4202,3011 4364,2849 4364,2497 4405,2456 4477.65,2456 U4.10
NetU3_4: U3.4 U4.4 | length 1472.9
  Top Layer w10: U3.4 3534,2660.38 3534,2819 3688,2973 4172,2973 4243,2902 4243,2621.35 U4.4
NetU3_6: U3.6 U4.1 | length 1207.7
  Bottom Layer w10: U3.6 3568,2494.38 3568,2804 3709,2945 4094.76,2945 U4.1
NetU3_8: U3.8 U4.2 | length 762.1
  Top Layer w10: U3.8 3956,2482.38 3956,2665 4050.06,2759.06 U4.2
NetU3_10: U3.10 U4.5 | length 448
  Bottom Layer w10: U3.10 U4.5
NetU3_12: U3.12 U4.9 | length 1379.7
  Top Layer w10: U3.12 3657,2583.38 3657,2233 3713,2177 4206,2177 4388.06,2359.06 U4.9
NetU4_3: U4.3 U5.22 | length 1297.5
  Bottom Layer w10: U5.22 3758,2027 3783,2052 4273,2052 4326,2105 4326,2513.76 U4.3
NetU4_6: U4.6 U5.21 | length 744.1
  Top Layer w10: U5.21 3944,2030 4181,2030 v1(4249,2098)
  Bottom Layer w10: U4.6 4249,2290.76 v1(4249,2098)
NetU4_8: U4.8 U5.23 | length 953.2
  Top Layer w10: U5.23 3861,2147 4330,2147 4442.04,2259.04 U4.8@4480.69,2259.04
NetU5_20: U5.20 U6.15 | length 1062.1
  Top Layer w10: U6.15 2958.55,1824.8 2974.75,1841 3855,1841 U5.20
O0: U5.1 U9.9 | length 1081.6
  Bottom Layer w10: U9.9 3558,767.06 U5.1
O1: U5.2 U8.9 U9.5 U9.10 U10.2 U11.12 | length 4295.6
  Top Layer w10: U9.10 3302,611.06 3302,1032 3415,1145 v1(3624,1145)
  Bottom Layer w10: U10.2 1675.31,982 2063.28,982 U11.12 2579.87,670.87 2611,639.73 2611,600 2700.76,510.24 U9.5 U9.10 ; U5.2 3658,1179 v1(3624,1145) 3592,1113 3592,508 3641,459 3959.5,459 U8.9
O2: U5.3 U8.5 U10.9 | length 4011.9
  Top Layer w10: U10.9 1643,492.04 1643,870 1879.3,1106.3 2980.32,1106.3 3421.26,1547.24 3653.54,1547.24 3758,1442.79 U5.3
  Bottom Layer w10: U8.5 3623,595.5 3623,1038 3758,1173 U5.3
O3: U5.4 U8.4 U8.10 | length 1183
  Bottom Layer w10: U5.4 3858,1231 3653,1026 3653,665.5 U8.4 3808.27,510.24 U8.10
O4: U5.5 U8.11 U9.4 U10.1 | length 4272.8
  Top Layer w10: U5.5 4057,1245 4057,885 4034,862 3958,862 3938,842 3938,795 3973,760 4069,760 4089,740 4089,631 4067,609 4009.5,609 U8.11
  Bottom Layer w10: U10.1 1615.31,1022 2437,1022 2848.76,610.24 U9.4 3098,807.06 3098,1045 3452,1399 3903,1399 U5.5
O5: U5.6 U8.1 U9.1 | length 1997.1
  Bottom Layer w10: U9.1 3433.94,1443 3959,1443 U5.6 3708.91,994.91 3708.91,910.87 U8.1
O6: U5.7 U9.2 | length 1501.9
  Top Layer w10: U9.2 3296.94,1206 v1(3982,1206)
  Bottom Layer w10: v1(3982,1206) 4061,1206 4154.47,1299.47 4154.47,1340.47 U5.7
O7: U5.8 U7.4 U7.9 U8.2 U8.3 | length 2116.9
  Top Layer w10: U7.4 4695.67,410.24 U7.9
  Bottom Layer w10: U8.3 U8.2 3777.24,810.24 4258,1291 U5.8 4388,1214 4388,717.91 U7.4
O8: U5.9
O9: U5.10 U8.13 | length 845.4
  Top Layer w10: U8.13 4222.24,810.24 4458,1046 U5.10
O10: U5.11 U7.3 | length 709
  Bottom Layer w10: U7.3 4436,769.91 4436,1156 4558,1278 U5.11
O11: U5.13
O12: U5.14 U7.1 U7.10 | length 2286.4
  Top Layer w10: U7.1 4622.83,910.24 4816.6,1104 v1(4895,1104)
  Bottom Layer w10: U5.14 4961,1541 4961,1170 ; U7.10 4871.24,510.24 4961,600 4961,1170 ; v1(4895,1104) 4961,1170
O13: U5.15 U7.11 | length 1549.5
  Bottom Layer w10: U5.15 4859,1543 4859,634 4835,610 4795.91,610 U7.11
O14: U5.16 U7.2 | length 1488.1
  Bottom Layer w10: U5.16 4811,1491 4811,1064 4557.24,810.24 U7.2
O15: U5.17 U7.5 U7.13 | length 2005.4
  Top Layer w10: U5.17 4937,1265 4937,916 4834.34,813.34 4798.77,813.34 U7.13
  Bottom Layer w10: U7.5 4577.24,510.24 4645,578 4645,725 4731,811 4794.91,811 U7.13
Y1: U7.12 U10.10 U10.12 | length 4336.2
  Top Layer w10: U10.10 1863.13,470.87 2019,315 2019,96 2076,39 4789,39 4885,135 4885,620.91 U7.12
  Bottom Layer w10: U10.10 1832,538.69 1832,603.04 U10.12
Y2: U9.3 U10.13 | length 1404.1
  Top Layer w10: U10.13 1811.24,770.87 2103.36,1062.99 2548.43,1062.99 U9.3
Y3: U7.6 U10.4 | length 3652.8
  Top Layer w10: v1(4148,118) 4203.43,118 U7.6
  Bottom Layer w10: U10.4 1401,507.69 1401,189.55 1472.55,118 v1(4148,118)
Y4: U9.6 U10.5 | length 1741.9
  Top Layer w10: v1(2634,229) 2815.24,410.24 U9.6
  Bottom Layer w10: U10.5 1527.13,470.87 1612,386 1612,275 1736,151 2556,151 v1(2634,229)
Y5: U8.8 U11.1 | length 2739.7
  Top Layer w10: U11.1 2026.87,870.87 1998,842 1998,752 2029.6,720.4 2146.7,720.4 2207,660.1 2207,315 2412,110 3808.03,110 U8.8
Y6: U8.12 U11.2 | length 2802.2
  Top Layer w10: U11.2 2146.13,770.87 2236,681 2236,346.3 2443.3,139 3734,139 3815,220 3815,516.97 U8.12
Y7: U8.6 U11.13 | length 1955.7
  Top Layer w10: U11.13 2375.28,770 2430,770 2497,703 2497,239 2568,168 3466.03,168 U8.6
Y8: U9.8 U11.4 | length 1315.3
  Bottom Layer w10: U11.4 2127.28,518 2455,518 2760,213 3103.94,213 U9.8
Y9: U7.8 U11.5 | length 3186.8
  Top Layer w10: U11.5 2127.87,470.87 2178,420.73 2178,273 2374,77 4766,77 4795.67,106.67 U7.8
pads on no net: DS1.5 S1.1 S1.4 S1.5 S1.6 SW1.3 SW2.3 SW3.3 SW4.3 SW5.3 SW6.3 SW7.3 SW8.3 SW9.3 SW10.3 SW11.3 SW12.3 SW13.3 SW14.3 SW15.3 SW16.3 U2.14 U2.15 U4.11 U4.12 U4.13 U6.14 U9.11 U9.12 U9.13 U11.8 U11.9 U11.10

## Polygon pours and split planes (outlines as drawn)
+5 on Top Layer "+5_L01_P001" (solid, pour order 1): 0,3543 0,0 5118,0 5118,3543
GND on Bottom Layer "GND_L02_P000" (solid, pour order 0): 0,3543 0,0 5118,0 5118,3543

## Silkscreen, mask and mechanical layers (free items; w line width, h text height)
Top Overlay:
  text "2" at 1657.8,3228.66 h80
  text "0" at 476.69,3224.72 h80
  text "1" at 1075.12,3224.72 h80
  text "3" at 2248.35,3224.72 h80
  text "4" at 472.76,2634.17 h80
  text "5" at 1071.18,2626.3 h80
  text "6" at 1657.8,2626.3 h80
  text "7" at 2256.22,2626.3 h80
  text "B" at 2256.22,2039.68 h80
  text "9" at 1067.24,2031.81 h80
  text "A" at 1661.73,2031.81 h80
  text "8" at 468.82,2023.94 h80
  text "C" at 476.69,1433.39 h80
  text "D" at 1082.99,1433.39 h80
  text "E" at 1673.54,1433.39 h80
  text "F" at 2256.22,1433.39 h80

## Dimensions
0,3543 to 5118,3543 on Top Paste
5118,0 to 5118,3543 on Top Paste